# Altium PCB Payload.PcbDoc
Units mm, origin at the board's own origin, x right, y up, seen from the top; angles counter-clockwise.
Board outline 52 x 45 mm, 2 copper layers (Top Layer, Bottom Layer), stack 1.569 mm thick; 10 components, 9 nets, 52 pads, 3 vias.
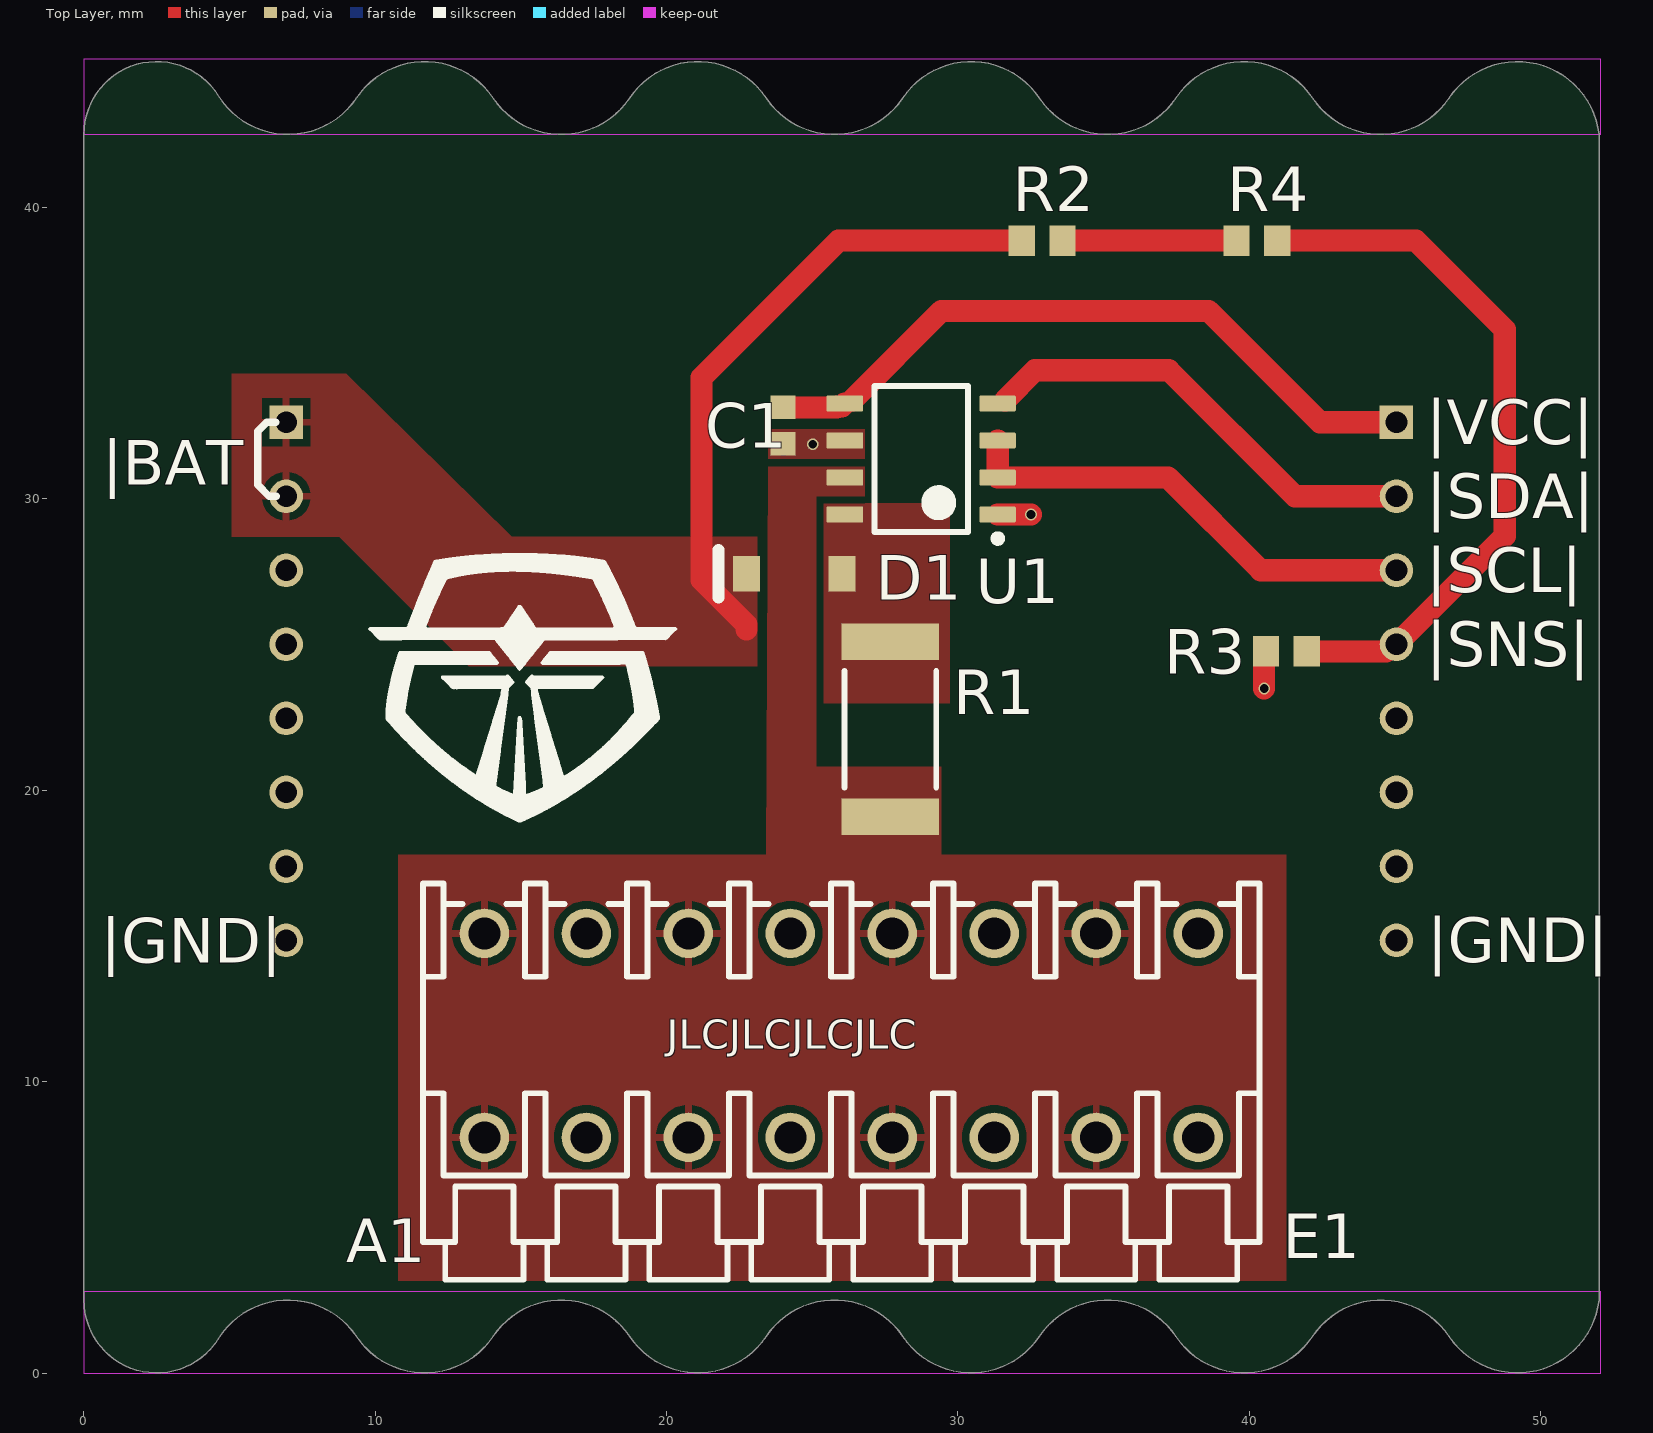
[diagram p0: Top Layer view]
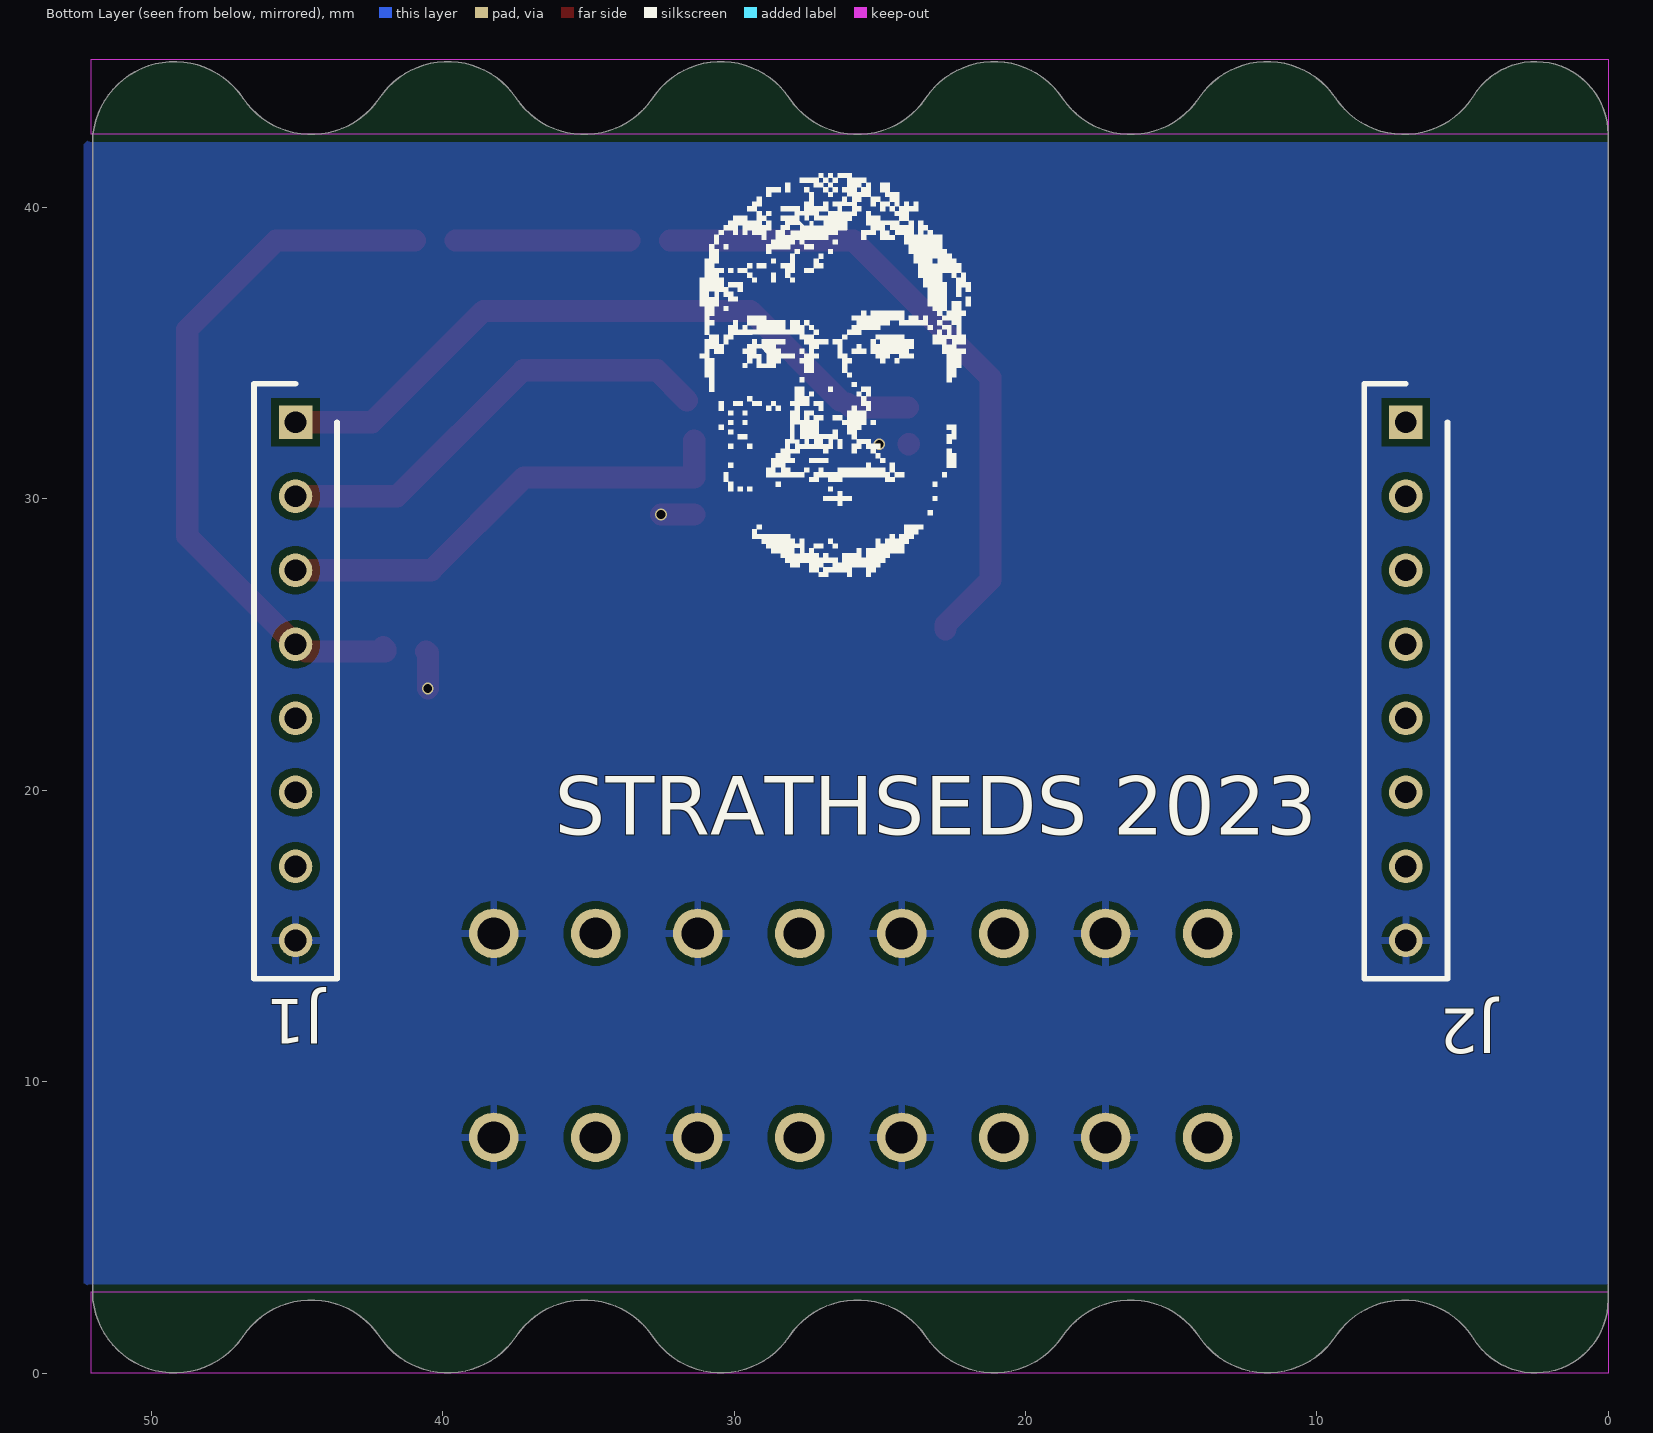
[diagram p1: Bottom Layer view, seen from below]
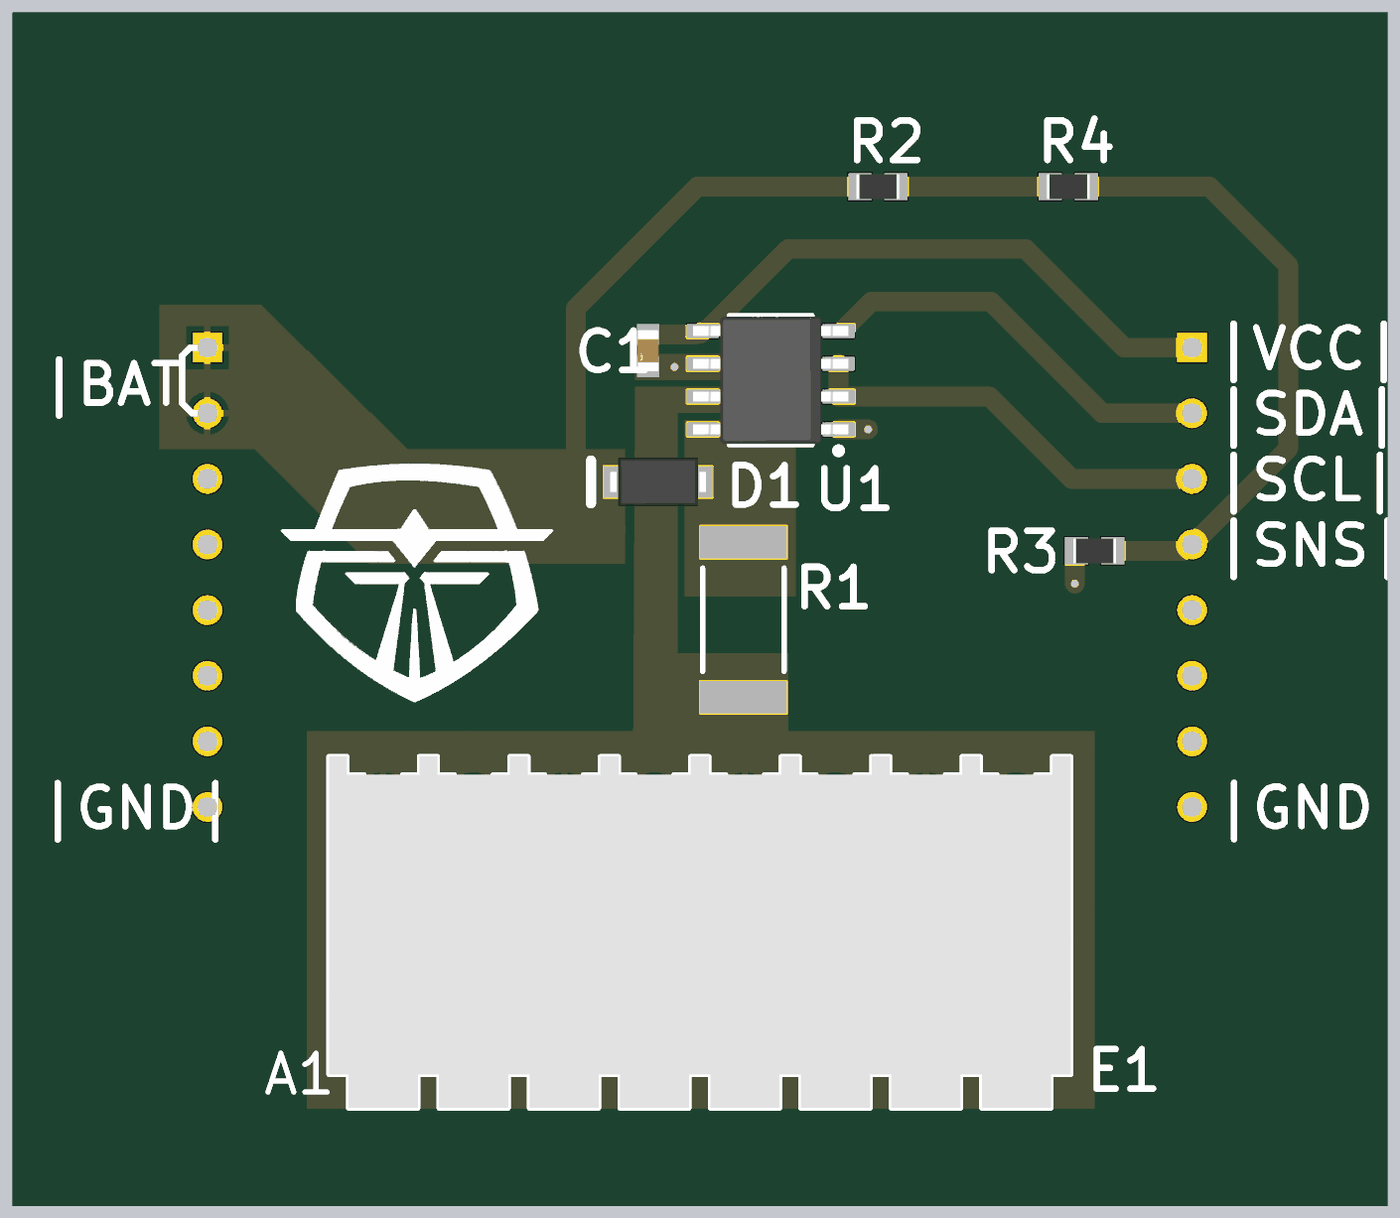
[diagram p2: 3D render of the assembled board from above, using the file's embedded part models]

## Layer stack, top to bottom
Top Solder: solder mask 0.0254, SM-001, Dk 4
Top Layer: signal copper 0.035
Dielectric 1: core 1.4986, Core-043, Dk 4.3
Bottom Layer: signal copper 0.035
Bottom Solder: solder mask 0.0254, SM-001, Dk 4

## Board outline
4.626,1.181 cw(c7.019,-0.316) 9.362,1.256 ccw(c11.706,2.828) 14.049,1.256 cw(c16.393,-0.316) 18.736,1.256 ccw(c21.08,2.828) 23.424,1.256 cw(c25.767,-0.316) 28.111,1.256 ccw(c30.454,2.828) 32.798,1.256 cw(c35.141,-0.316) 37.485,1.256 ccw(c39.829,2.828) 42.172,1.256 cw(c44.516,-0.316) 46.859,1.256 ccw(c49.203,2.828) 52.006,2.506 52.006,42.506 ccw(c49.203,42.184) 46.859,43.756 cw(c44.516,45.328) 42.172,43.756 ccw(c39.829,42.184) 37.485,43.756 cw(c35.141,45.328) 32.798,43.756 ccw(c30.454,42.184) 28.111,43.756 cw(c25.767,45.328) 23.424,43.756 ccw(c21.08,42.184) 18.736,43.756 cw(c16.393,45.328) 14.049,43.756 ccw(c11.706,42.184) 9.362,43.756 cw(c7.019,45.328) 4.626,43.832 ccw(c2.506,42.506) 0.006,42.506 0.006,2.506 ccw(c2.506,2.506)

## Design rules (kind name [scope] priority, off if disabled: settings)
Clearance [All] p1: gap=0.254 ignorepadtopadclearanceinfootprint=TRUE except(0: Arc-Hole Track-Hole SMDPad-Hole THPad-Hole Via-Hole Fill-Hole Poly-Hole Region-Hole Text-Hole; 0.09: Arc-Arc Arc-Track Track-Track; 0.127: SMDPad-SMDPad; 0.2: Arc-SMDPad Track-SMDPad; 0.33: Arc-THPad Track-THPad; 0.5: THPad-THPad)
DiffPairsRouting [All] p1: maxlimit=0.254 minlimit=0.09 mostfreqgap=0.254 toplayer_minwidth=0.09 toplayer_maxwidth=0.381 toplayer_prefwidth=0.254 bottomlayer_minwidth=0.09 bottomlayer_maxwidth=0.381 bottomlayer_prefwidth=0.254 maxuncoupledlength=12.7
HoleSize [All] p1: absolutevalues=TRUE maxlimit=6.3 minlimit=0.2 maxpercent=80.000 minpercent=20.000
HoleToHoleClearance [All] p1: gap=0.5 allowstackedmicrovias=TRUE
MinimumSolderMaskSliver [All] p1: minsoldermaskwidth=0.1
PlaneClearance [All] p1: clearance=0.254
PlaneConnect [All] p1: pad.planeconnectstyle=Relief pad.reliefexpansion=0.254 pad.reliefentries=4 pad.reliefconductorwidth=0.254 pad.reliefairgap=0.254 via.planeconnectstyle=Direct via.reliefexpansion=0.508 via.reliefentries=4 via.reliefconductorwidth=0.254 via.reliefairgap=0.254
PolygonConnect [All] p1: thpad.connectstyle=Relief thpad.reliefconductorwidth=0.254 thpad.reliefentries=4 thpad.polygonreliefangle="90 Angle" thpad.airgapwidth=0.254 smdpad.connectstyle=Direct smdpad.reliefconductorwidth=0.254 smdpad.reliefentries=4 smdpad.polygonreliefangle="90 Angle" smdpad.airgapwidth=0.254 via.connectstyle=Direct via.reliefconductorwidth=0.254 via.reliefentries=4 via.polygonreliefangle="90 Angle" via.airgapwidth=0.254
RoutingVias [All] p1: holewidth=0.2 width=0.35 viastyle="Through Hole" minholewidth=0.15 minwidth=0.25 maxholewidth=0.711 maxwidth=1.27 useviatemplates=TRUE viatemplateguid#1={842D295A-8E56-4614-9B11-91D02DC00ACA} viatemplateguid#2={7C6A3F83-D217-419B-9190-88431C2A1CC1} viatemplatename#1=v25h15 viatemplatename#2=v35h20
SilkToSilkClearance [All] p1: silktosilkclearance=0.09
SilkToSolderMaskClearance [IsPad] p1: minsilkscreentomaskgap=0.15 clearancetoexposedcopper=TRUE
SolderMaskExpansion SolderMaskExpansion_via [IsVia] p1: expansion=0.102 istentingtop=TRUE
SolderMaskExpansion [All] p2: expansion=0.05 istentingtop=FALSE
Width [All] p1: maxlimit=0.76 minlimit=0.09 preferedwidth=0.254
22 further rules are at their usual default settings.

## Classes and differential pairs
net class Power: GND VCC
net class Data: Solar_SCL Solar_SDA Solar_VSense

## Components (designator, comment, footprint, x,y, rotation, side; value= is the part's Value field where it differs from the comment)
C1 "Generic-Capacitor" FP-0603-L_1_6_0_15-W_0_81-IPC_C 24.003,32.512 r270 top value=100nF
D1 "SM4007PL-TP" MCC-SOD-123FL_V 24.384,27.432 r180 top
E1 "1824480000" LSF_SMT_3_5_90_08 26,10 r0 top
J1 "5-146278-8" HDRV8W56P0X254_1X8_1991X234X872P 45.05,32.63 r270 bottom locked
J2 "5-146278-8" HDRV8W56P0X254_1X8_1991X234X872P 6.95,32.63 r270 bottom locked
R1 ")" RESC2512(6432)_N 27.686,22.098 r90 top value=400mR
R2 "Generic-Resistor" RESC1609X50X30ML8T20 32.893,38.862 r180 top value=6M
R3 "Generic-Resistor" RESC1609X50X30ML8T20 41.275,24.765 r0 top value=2M2
R4 "Generic-Resistor" RESC1609X50X30ML8T20 40.259,38.862 r180 top value=6M
U1 "INA219AIDR" D0008A_L 28.744,31.369 r180 top

## Footprints (in the part's own frame and the unit in brackets; to place one, negate y for a bottom-side part, rotate by r counter-clockwise, add the part's x,y. Pads: shape width x height; smd on the part's side, far side on the other; paste and mask are expansions set on the pad)
D0008A_L [mm] "SOIC, 8-Leads, Body 5x4mm, Pitch 1.27mm, IPC High Density"
  rrect18% 1.25x0.55 smd: 1(-2.625,1.905) 2(-2.625,0.635) 3(-2.625,-0.635) 4(-2.625,-1.905) 5(2.625,-1.905) 6(2.625,-0.635) 7(2.625,0.635) 8(2.625,1.905)
  silkscreen extent -2.75,-2.5 1.6,2.85, body extent -3,-2.45 3,2.45, height 1.63
FP-0603-L_1_6_0_15-W_0_81-IPC_C [mm]
  rect 0.807x0.868 smd paste+0 mask+0: 1(-0.626,0) 2(0.626,0)
  body extent -1.13,-0.58 1.13,0.58, height 0.25
HDRV8W56P0X254_1X8_1991X234X872P [mm]
  rect 1.15x1.15 / inner round 1.15 / far side rect 1.15x1.15 hole 0.75: 1(0,0)
  round 1.15 hole 0.75: 2(2.54,0) 3(5.08,0) 4(7.62,0) 5(10.16,0) 6(12.7,0) 7(15.24,0) 8(17.78,0)
  silkscreen extent -1.32,-1.43 19.1,1.43, body extent -1.07,-1.17 18.85,1.17, height 8.12
LSF_SMT_3_5_90_08 [mm] "OMNIMATE Signal - Serie LSF  LSF-SMT 3.50/08/90 3.5"
  round 1.7 hole 1.1: A1(-12.25,-1.91) A1(-12.25,5.09) A2(-8.75,-1.91) A2(-8.75,5.09) A3(-5.25,-1.91) A3(-5.25,5.09) A4(-1.75,-1.91) A4(-1.75,5.09) A5(1.75,-1.91) A5(1.75,5.09) A6(5.25,-1.91) A6(5.25,5.09) A7(8.75,-1.91) A7(8.75,5.09) A8(12.25,-1.91) A8(12.25,5.09)
  silkscreen extent -14.35,-6.8 14.35,6.8, body extent -14.35,-6.8 14.35,6.8, height 8.51
MCC-SOD-123FL_V [mil] "SODFL, 2-Leads, Body 3.1x1.9mm"
  rect 36x48 smd: 1(-64.5,0) 2(64.5,0)
  silkscreen extent 102,-32 102,32, body extent -73,-37 73,37, height 47
RESC1609X50X30ML8T20 [mm] "Chip Resistor, 2-Leads, Body 1.65x0.95mm, IPC Low Density"
  rect 0.9x1.05 smd: 1(-0.7,0) 2(0.7,0)
  body extent -0.82,-0.48 0.82,0.48, height 0.5
RESC2512(6432)_N [mm] "Chip Resistor, Body 6.4x3.2mm, IPC Medium Density"
  rect 1.25x3.35 smd: 1(-3,0) 2(3,0)
  silkscreen extent -2,-1.57 2,1.58, body extent -3.25,-1.7 3.25,1.7, height 0.75

## Part data
C1: library part CMP-001-00088-6, "Generic 0603 Capacitor", Case Code (Imperial)=0603, Dielectric=X7R, LCSC Part #=C14663, Tolerance=10%, Voltage Rating=50V, ESR=0R
D1: library part CMP-004-00034-1, "DIODE GEN PURP 1KV 1A SOD123FL", LCSC Part #=C64898
E1: library part CMP-002-00084-1, "Weidmüller OMNIMATE Signal - series LSF LSF-SMT 3.50/08/90 3.5SN BK TU - 1824480000"
J1 J2: library part CMP-077-000000-1, "08 MODII HDR SRST B/A .100CL", Manufacturer_Name="TE Connectivity", Mouser Part Number=571-5-146278-8, Datasheet Link=https://componentsearchengine.com/Datasheets/1/5-146278-8.pdf, Design Item ID=5-146278-8, Geometry.Height=8.72mm, Manufacturer_Part_Number=5-146278-8, Mouser Price/Stock=https://www.mouser.com/Search/Refine.aspx?Keyword=571-5-146278-8, Source=5-146278-8.SchLib
R1: library part CMP-1018-00507-1, "931R 1W 1% 2512 (6432 Metric)  SMD", Case-EIA=2512, Case-Metric=6432, Power="1 W", Tolerance="1 %", Technology=SMT
R2 R4: library part CMP-009-00185-4, "Generic 0603 Resistor", Case Code (Imperial)=0603, Case Code (Metric)=1608, Power Rating=100mW, Tolerance=1%, Voltage Rating=75V
R3: library part CMP-009-00185-4, "Generic 0603 Resistor", Case Code (Imperial)=0603, Case Code (Metric)=1608, LCSC Part #=C322103, Power Rating=100mW, Tolerance=1%, Voltage Rating=75V
U1: library part CMP-010-00030-1, "Current Monitor Regulator High-Side 10mA 8-SOIC", LCSC Part #=C138706

## Via types
v1: diameter 0.4, hole 0.3, Top Layer to Bottom Layer, tented both sides, 3 vias

## Nets (pads, with @x,y where several pads share a name; then routed paths per layer and width w, separated by ;. In a path a pad name is that pad's centre, name@x,y a point inside that pad or via, vN(x,y) a via of type N, cw(c..) or ccw(c..) an arc to the next point about the centre after c; other vN are vias at no path point)
GND: C1.2 E1.A2 E1.A4 E1.A6 E1.A8 J1.8 J2.8 R3.1 U1.1 U1.6 | length 2.5
  Top Layer w0.76: C1.2 C1.2@24.012,31.877 ; U1.1 v1(32.512,29.464) ; v1(40.513,23.495) 40.513,24.703 R3.1
  other v1: 25.019,31.877
NetR2_1: R2.1 R4.2 | length 6
  Top Layer w0.76: R2.1 R4.2
Panel_12_+: E1.A1 E1.A3 E1.A5 E1.A7 R1.1 U1.7
Solar_ISense_+: D1.1 R1.2 U1.8
Solar_SCL: J1.3 U1.2 U1.3 | length 16.3
  Top Layer w0.76: U1.3 U1.2 37.211,30.734 40.395,27.55 J1.3
Solar_SDA: J1.2 U1.4 | length 15.7
  Top Layer w0.76: U1.4@31.614,33.379 32.652,34.417 37.24,34.417 41.567,30.09 J1.2
Solar_VSense: J1.4 R3.2 R4.1 | length 24.8
  Top Layer w0.76: R4.1 45.72,38.862 48.768,35.814 48.768,28.728 J1.4 44.944,25.01 44.699,24.765 R3.2 41.975,24.84 R3.2@42.045,24.91
VCC: C1.1 J1.1 U1.5 | length 23.7
  Top Layer w0.76: C1.1@24.034,33.138 25.843,33.138 25.874,33.169 26.014,33.169 U1.5 ; U1.5@26.364,33.379 29.434,36.449 38.608,36.449 42.427,32.63 J1.1
VSol: D1.2 J2.1 J2.2 R2.2 | length 22.2
  Top Layer w0.76: 22.746,25.527 22.746,25.679 21.209,27.216 21.209,34.163 25.908,38.862 R2.2
pads on no net: J1.5 J1.6 J1.7 J2.3 J2.4 J2.5 J2.6 J2.7

## Polygon pours and split planes (outlines as drawn)
GND on Bottom Layer "NONET_L-01_P-001" (solid, pour order 0): 0,42.418 52.07,42.418 52.324,42.164 52.324,2.506 0,2.506
Panel_12_+ on Top Layer "NONET_L-01_P-001" (solid, pour order 7): 23.495,31.115 26.797,31.115 26.797,30.099 25.146,30.099 25.146,20.806 29.423,20.806 29.423,17.653 25.155,17.653 23.423,17.653
Solar_ISense_+ on Top Layer "NONET_L-01_P-001" (solid, pour order 9): 25.4,29.845 25.4,22.987 29.718,22.987 29.718,29.845
VSol on Top Layer "NONET_L-01_P-001" (solid, pour order 10): 5.08,34.29 9.017,34.29 14.694,28.702 23.114,28.702 23.114,24.257 13.208,24.257 8.763,28.702 5.08,28.702
Panel_12_+ on Top Layer "NONET_L-01_P-001" (solid, pour order 6): 10.795,3.175 10.795,17.78 41.275,17.78 41.275,3.175
GND on Top Layer "NONET_L-01_P-001" (solid, pour order 5): 23.495,32.385 26.797,32.385 26.797,31.369 23.495,31.369

## Keep-outs
Keep-Out Layer:
  region: 0,45.085 0,42.506 52.07,42.506 52.07,45.085
  region: 0,2.794 0,0 52.07,0 52.07,2.794

## Silkscreen, mask and mechanical layers (free items; w line width, h text height)
Top Overlay:
  drawing of 8 lines, arcs and shapes, not listed
  text "|VCC|" at 46.084,31.868 h1.52
  text "|BAT" at 0.636,30.488 h1.52
  text "|SDA|" at 46.084,29.328 h1.52
  text "|SCL|" at 46.084,26.788 h1.52
  text "|SNS|" at 46.084,24.248 h1.52
  text "|GND|" at 0.584,14.088 h1.52
  text "|GND|" at 46.102,14.097 h1.52
  text "JLCJLCJLCJLC" at 20.012,11.122 h1
Bottom Overlay:
  drawing of 111 lines, arcs and shapes, not listed
  text "STRATHSEDS 2023" at 36.164,18.479 h2
Mechanical 1:
  lines w0.013: 0.006,2.506 ccw(c2.506,2.506) 4.626,1.181 cw(c7.019,-0.316) 9.362,1.256 ccw(c11.706,2.828) 14.049,1.256 cw(c16.393,-0.316) 18.736,1.256 ccw(c21.08,2.828) 23.424,1.256 cw(c25.767,-0.316) 28.111,1.256 ccw(c30.454,2.828) 32.798,1.256 cw(c35.141,-0.316) 37.485,1.256 ccw(c39.829,2.828) 42.172,1.256 cw(c44.516,-0.316) 46.859,1.256 ccw(c49.203,2.828) 52.006,2.506 ; 0.006,42.506 cw(c2.506,42.506) 4.626,43.832 ccw(c7.019,45.328) 9.362,43.756 cw(c11.706,42.184) 14.049,43.756 ccw(c16.393,45.328) 18.736,43.756 cw(c21.08,42.184) 23.424,43.756 ccw(c25.767,45.328) 28.111,43.756 cw(c30.454,42.184) 32.798,43.756 ccw(c35.141,45.328) 37.485,43.756 cw(c39.829,42.184) 42.172,43.756 ccw(c44.516,45.328) 46.859,43.756 cw(c49.203,42.184) 52.006,42.506
Board Shape:
  the board outline again, w1.2

## Text inside footprints (layer, text, board x,y; h text height)
E1: Top Overlay "A1" at 9.017,3.81 h1.5